# EAGLE board openSX70-dongle-USB-V2 - Copy (EAGLE 9.2.0)
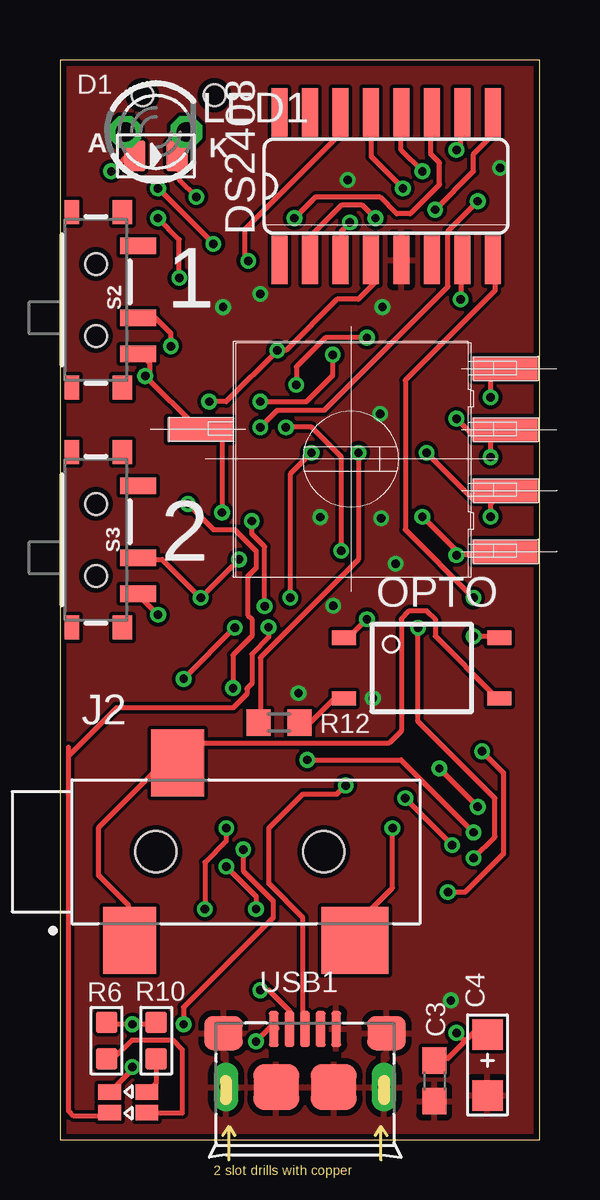
[diagram p0: board, top side]
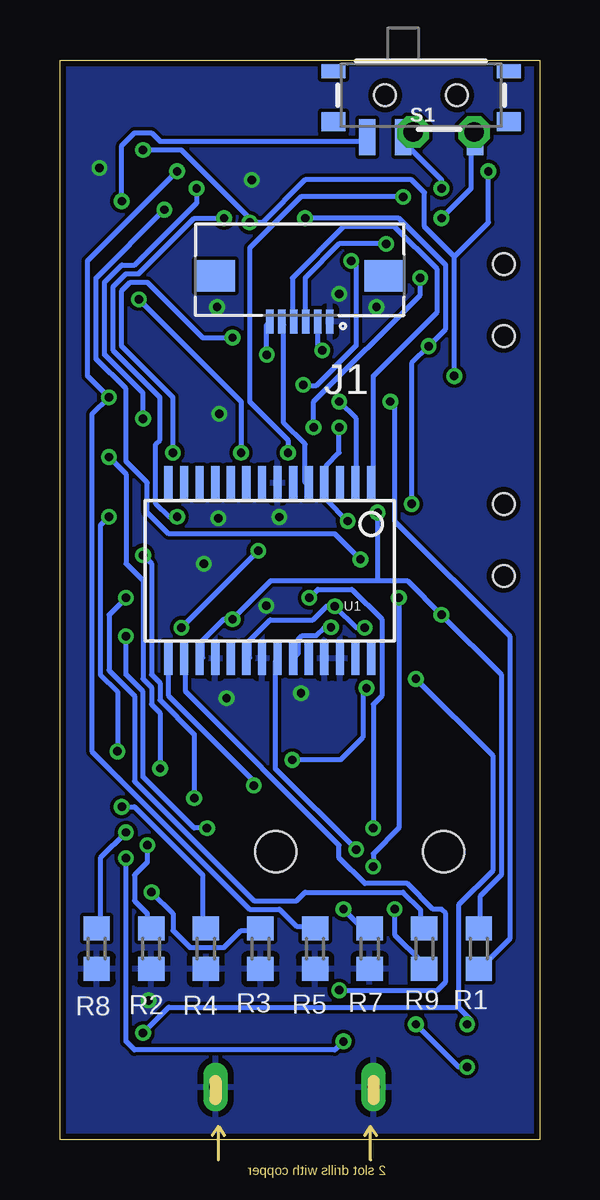
[diagram p1: board, bottom side, seen from below]

Size 20 x 45 mm. Coordinates in mm from the lower left corner, seen from the top.
Outline: 0,0 20,0 20,45 0,45 0,0
Copper layers (1*16): Top 0.035mm / dielectric 1.5mm / Bottom 0.035mm
Design rules "SeeedStudio_2layer_DRU_no_angle_20140221": minimum track width 6mil, minimum drill 12mil, track to track 6mil, track to pad 6mil, pad to pad 6mil, via to via 6mil, smd to smd 0mil, copper to edge 10mil, drill to drill 10mil, minimum pad ring 10mil, minimum via ring 6mil, stop-mask expansion 2mil, vias tented up to drill 100mil, thermal gap 10mil
Net classes: 0 GND: width 0.203 mm; 1 power: width 0.203 mm; 2 2.8V: width 0.203 mm

## Footprints (pad centres in the part's own frame; a part is rotated, then mirrored left to right if it is on the bottom)
C0603 = smd 1.1 x 1: 1 -0.85,0; 2 0.85,0
AVX-A = smd 1.27 x 1.27: + -1.27,0; - 1.27,0
LED-0805 = smd 0.889 x 1.27: + -0.889,0; - 0.889,0
SO16 = smd 0.66 x 2.032: 1 -4.445,-3.073; 2 -3.175,-3.073; 3 -1.905,-3.073; 4 -0.635,-3.073; 5 0.635,-3.073; 6 1.905,-3.073; 7 3.175,-3.073; 8 4.445,-3.073; 9 4.445,3.073; 10 3.175,3.073; 11 1.905,3.073; 12 0.635,3.073; 13 -0.635,3.073; 14 -1.905,3.073; 15 -3.175,3.073; 16 -4.445,3.073
687106183722 = smd 0.3 x 1: 1 -1.25,1.9; 2 -0.75,1.9; 3 -0.25,1.9; 4 0.25,1.9; 5 0.75,1.9; 6 1.25,1.9 | smd 1.65 x 1.3: Z1 -3.525,0; Z2 3.525,0
CUI_SJ-3523-SMT-TR = smd 2.2 x 2.8: 1 -1.1,-3.7; 3 0.9,3.7 | smd 2.8 x 2.8: 2 8.3,-3.7 | hole 1.7: 0,0; 7,0
LED3MM = drill 0.813 octagon: A -1.27,0; K 1.27,0
SO-4 = smd 1 x 0.6: 1 -3.24,0.635; 2 -3.24,-1.905; 3 3.24,-1.905; 4 3.24,0.635
R0603 = smd 1 x 1.1: 1 -0.85,0; 2 0.85,0
R0603' = smd 0.889 x 0.889: 1 0,0.762; 2 0,-0.762
SWITCH_SPST_SMD_A = smd 0.7 x 1.5: 1 -2.25,-1.75; 2 -0.75,-1.75; 3 2.25,-1.75 | smd 1 x 0.6: GND1 -3.65,1; GND3 3.65,1 | smd 1 x 0.8: GND2 -3.65,-1.1; GND4 3.65,-1.1 | hole 0.9: -1.5,0; 1.5,0
A6RS-161RS = smd 1 x 2.7: 1 8.89,-1.397; 2 6.35,-1.397; 4 3.81,-1.397; 8 1.27,-1.397; C 6.35,11.303
SSOP28DB = smd 0.348 x 1.397: 1 -4.225,-3.656; 2 -3.575,-3.656; 3 -2.925,-3.656; 4 -2.275,-3.656; 5 -1.625,-3.656; 6 -0.975,-3.656; 7 -0.325,-3.656; 8 0.325,-3.656; 9 0.975,-3.656; 10 1.625,-3.656; 11 2.275,-3.656; 12 2.925,-3.656; 13 3.575,-3.656; 14 4.225,-3.656; 15 4.225,3.656; 16 3.575,3.656; 17 2.925,3.656; 18 2.275,3.656; 19 1.625,3.656; 20 0.975,3.656; 21 0.325,3.656; 22 -0.325,3.656; 23 -0.975,3.656; 24 -1.625,3.656; 25 -2.275,3.656; 26 -2.925,3.656; 27 -3.575,3.656; 28 -4.225,3.656
LTST-BILED-15X16 = smd 0.65 x 0.952: P$1 0.425,0.776; P$2 -0.425,0.776; P$3 0.425,-0.776; P$4 -0.425,-0.776
MICRO-USB5+6P-SMD-0.65-B = smd 0.4 x 1.5: 1 -1.3,-0.25; 2 -0.65,-0.25; 3 0,-0.25; 4 0.65,-0.25; 5 1.3,-0.25 | smd 1.6 x 1.4: S1 -3.4,-0.427; S6 3.4,-0.427 | drill 0.508 pad 1.016 long: S2 -3.3,-2.675; S5 3.3,-2.675 | smd 1.9 x 1.9: S3 -1.2,-2.675; S4 1.2,-2.675

## Placement (x,y rotation side)
C3  100nf  [C0603]  15.61,2.45 270 top
C4  10uf  [AVX-A]  17.83,3.11 270 top
D1  YELLOW-0805  [LED-0805]  4,41 0 top
DS2408  DS2408  [SO16]  13.6,39.74 0 top
J1  687106183722  [687106183722]  10,36 180 bottom
J2  SJ-3523-SMT-TR  [CUI_SJ-3523-SMT-TR]  4,12 0 top
LED1  [LED3MM]  4,42 0 top
OPTO  TLP127  [SO-4]  15.09,20.29 0 top
R1  4K7  [R0603]  2.53,7.96 90 bottom
R2  100K  [R0603]  16.19,7.96 270 bottom
R3  100K  [R0603]  11.64,7.96 90 bottom
R4  100K  [R0603]  13.92,7.96 90 bottom
R5  100K  [R0603]  9.36,7.96 90 bottom
R6  1K  [R0603']  1.94,4.12 180 top
R7  100K  [R0603]  7.08,7.96 270 bottom
R8  100K  [R0603]  18.47,7.96 270 bottom
R9  220R  [R0603]  4.81,7.96 270 bottom
R10  1K  [R0603']  4.02,4.12 180 top
R12  220R  [R0603]  9.14,17.38 0 top
S1  [SWITCH_SPST_SMD_A]  4.94,43.53 0 bottom
S2  [SWITCH_SPST_SMD_A]  1.5,35 90 top
S3  [SWITCH_SPST_SMD_A]  1.5,25 90 top
SELECTOR  A6RS  [A6RS-161RS]  17.15,23.24 90 top
U1  FT232RLSSOP  [SSOP28DB]  11.25,23.71 180 bottom
U$5  DUOLED-PROPER-LTST-C195KGJRKT  [LTST-BILED-15X16]  2.85,1.55 270 top
USB1  10118193-0001LF  [MICRO-USB5+6P-SMD-0.65-B]  10.22,4.86 0 top

## Library data of the parts
C3 R1-R5 R7-R9 R12 = resistor
C4 = Seeed-Capacitor-2016; MPN: TAJA106K016RNJ
D1 = Seeed-LED-2016; MPN: 17-215UYC/S530-A3/TR8
DS2408 = DS2408-joaco
J1 = openSX70_PATHFINDER_V5.5-SEEED_20180522; AVAILABILITY: Good; DESCRIPTION: CONN FFC BTM 6POS 0.5MM SMD R/A; MF: Wurth Electronics; MP: 687106183722; PACKAGE: None; PRICE: 1.21 USD
J2 = SJ-3523-SMT-TR; AVAILABILITY: Unavailable; CUI_PURCHASE_URL: https://www.cui.com/product/interconnect/audio-connectors/3.5-mm-jacks/sj-352x-smt-series?utm_source=snapeda.com&utm_medium=referral&utm_campaign=snapedaBOM; DESCRIPTION: SJ Series 3.5 mm 12 V SMT Right Angle Stereo Audio Jack; MF: CUI Inc.; MP: SJ-3523-SMT-TR; PACKAGE: LGA-10 STMicroelectronics; PRICE: None
LED1 = openSX70_PATHFINDER_V5.5-SEEED_20180522
OPTO = openSX70
R6 R10 = openSX70_PATHFINDER_V5.5-SEEED_20180522; MPN: RC0603FR-071KL
S1-S3 = SparkFun-Switches; PROD_ID: SWCH-10651; SF_SKU: COM-10860
SELECTOR = _openSX70
U1 = SparkFun
U$5 = _openSX70; AVAILABILITY: Unavailable; DESCRIPTION: Green/Red 130° Water Clear 35/25 mcd 2 V 0605 Surface Mount Bi-Color LED; MF: Lite-On Inc.; MP: LTST-C195KGJRKT; PACKAGE: 0606 Lite-On; PRICE: None
USB1 = Seeed-Connector -2016; MPN: 10118193-0001LF

## Nets
1W: DS2408.4 J1.2 R1.1
3V3OUT: D1.+ DS2408.3 DS2408.10 LED1.A OPTO.1 R1.2 S2.1 S3.1 SELECTOR.C U1.17
5V: C3.1 C4.+ R6.2 R10.2 S1.1 U1.4 U1.20
5V-J1: J1.3 S1.2
CTS: U1.11
DTR: J1.6 U1.2
GND: C3.2 C4.- DS2408.5 J1.1 R2.2 R3.1 R4.1 R5.1 R7.2 R8.2 U1.7 U1.18 U1.21 U1.25 U1.26 USB1.5 USB1.S1 USB1.S2 USB1.S3 USB1.S4 USB1.S5 USB1.S6
N$1: J2.1 J2.3 OPTO.3
N$2: D1.- LED1.K R9.2
N$3: DS2408.2 R2.1 SELECTOR.8
N$4: DS2408.14 R3.2 SELECTOR.4
N$5: DS2408.13 R4.2 SELECTOR.2
N$6: DS2408.11 R8.1 S2.2
N$7: DS2408.9 R7.1 S3.2
N$8: DS2408.8 R9.1
N$9: R10.1 U$5.P$2
N$10: OPTO.2 R12.2
N$11: DS2408.7 R12.1
N$12: J2.2 OPTO.4
N$13: DS2408.12 R5.2 SELECTOR.1
N$14: R6.1 U$5.P$1
N$16: U1.16 USB1.2
RXI: J1.5 U1.5
RXLED: U1.22 U$5.P$4
TXLED: U1.23 U$5.P$3
TXO: J1.4 U1.1
USB_D+: U1.15 USB1.3
VCC-USB: S1.3 USB1.1

## Tracks (layer width: path | path; a pad name or v marks a point on that pad's centre or on a via)
1W  (via drill 0.35)
  Top 0.203: DS2408.4 12.98,36.63 13.16,36.45 13.16,35.74 12.45,35.03 11.56,35.03 9.42,32.89 v9.07,32.89 6.93,30.76 v6.22,30.76
  Bottom 0.203: v9.07,32.89 9.25,33.07 9.25,33.96 J1.2 | v6.22,30.76 6.04,30.58 6.04,25.78 1.25,20.98 1.25,8.36 2.49,7.11 R1.1
3V3OUT  (via drill 0.35)
  Top 0.203: v12.8,21.69 12.09,20.98 11.91,20.98 OPTO.1 | v4.09,21.87 3.38,22.58 S3.1 | 3.02,40.89 2.67,40.89 v2.13,40.36 | 3.02,40.89 D1.+ | S2.1 3.38,32.72 3.73,32.36 3.73,32 v3.56,31.83 5.69,29.69 SELECTOR.C 5.87,29.52 6.4,29.52 6.76,29.16 v6.76,26.14 | v12.09,38.23 11.73,37.87 11.73,36.8 DS2408.3 | v16.54,41.25 16.71,41.43 16.71,42.67 DS2408.10 | LED1.A 2.73,41.19 3.02,40.89
  Bottom 0.203: U1.17 14.05,20.09 14.05,20.8 13.16,21.69 v12.8,21.69 11.2,23.29 6.76,23.29 | 6.76,23.29 5.51,23.29 v4.09,21.87 1.6,19.38 1.6,11.02 2.49,10.13 2.49,8.89 R1.2 | v2.13,40.36 2.13,38.23 3.56,36.8 | v3.56,31.83 3.56,36.8 | 11.91,38.23 11.56,38.23 9.78,40.01 5.33,40.01 4.8,39.47 4.8,38.05 3.56,36.8 | v16.54,41.25 14.94,41.25 11.91,38.23 | 11.91,38.23 v12.09,38.23 | v6.76,26.14 6.76,23.29
5V  (via drill 0.35)
  Top 0.203: R6.2 1.96,4.8 v3.02,4.8 3.91,4.8 R10.2 | 16.89,4.09 17.25,4.45 17.78,4.45 C4.+ | 16.89,4.09 16.18,3.38 15.65,3.38 C3.1 | 16.89,4.09 v16.54,4.45 | v8,25.78 8,25.25 8.53,24.71 v8.53,22.23 | v17.42,39.12 16.18,37.87 16.18,35.56 11.02,30.4 9.07,30.4 v8.36,29.69 | v7.29,21.34 v5.16,19.2
  Bottom 0.203: v3.02,4.8 2.85,4.8 2.85,4.98 3.38,5.51 | 3.38,5.51 15.47,5.51 v16.54,4.45 | v8,25.78 8.89,26.67 8.89,27.2 U1.4 8.89,27.38 8.89,28.09 8.36,28.63 v8.36,29.69 | U1.20 12.09,20.09 12.09,20.8 11.23,21.66 9.46,21.66 8.89,22.23 v8.53,22.23 7.64,21.34 v7.29,21.34 | v17.42,39.12 17.42,41.43 16.89,41.96 16.18,41.96 15.82,41.6 7.29,41.6 S1.1 | 3.38,5.51 3.38,9.78 1.96,11.2 1.96,16 v5.16,19.2
5V-J1  (via drill 0.35)
  Top 0.203: v4.09,39.65 v6.4,37.34
  Bottom 0.203: v6.4,37.34 8.36,37.34 9.78,35.92 9.78,34.14 J1.3 | v4.09,39.65 4.09,40.01 5.69,41.6 S1.2
DTR  (via drill 0.35)
  Top 0.203: v11.38,32.72 11.38,31.86 10.27,30.76 v8.36,30.76
  Bottom 0.203: v11.38,32.72 11.38,33.96 J1.6 | v8.36,30.76 7.64,30.05 7.64,27.38 U1.2
GND  (via drill 0.35)
  other vias: 14,24 12,40 11.4,22.25 13.35,30.25 6.8,34.7 8.35,35.25 9.95,18.6 13.45,34.7 13.05,18.4 10.85,25.95 13.4,25.9 18.35,40.5 16.3,5.8
  pour Top: 0,45 20,45 20,0 0,0
  pour Bottom: 0,45 20,45 20,0 0,0
N$1
  Top 0.203: OPTO.3 18.31,18.49 18.14,18.49 15.65,20.98 15.65,21.69 15.29,22.05 14.58,22.05 14.23,21.7 14.23,17.03 13.73,16.54 5.69,16.54 4.98,15.82 J2.3 4.8,15.65 4.27,15.65 1.6,12.98 1.6,11.02 2.85,9.78 2.85,8.36 J2.1
N$2  (via drill 0.35)
  Top 0.203: v6.04,9.6 6.04,11.56 6.93,12.45 v6.93,12.98 | v9.6,22.58 9.6,27.74 v10.49,28.63 | v5.69,39.29 4.98,40.01 4.98,40.89 D1.- 5.27,41.38 LED1.K
  Bottom 0.203: v6.04,9.6 6.04,8.53 4.98,7.47 4.98,7.11 R9.2 | v6.93,12.98 6.93,18.14 6.58,18.49 6.58,21.69 7.82,22.94 9.25,22.94 v9.6,22.58 | v10.49,28.63 10.49,29.16 12.09,30.76 12.09,37.16 9.96,39.29 v5.69,39.29
N$3  (via drill 0.35)
  Top 0.203: v14.4,14.22 v16.36,12.27 | 16.71,24.36 18.49,24.36 SELECTOR.8 | v13.16,38.41 12.62,38.94 11.73,38.94 10.49,37.69 10.49,36.8 DS2408.2 | 16.71,24.36 v15.11,25.96 | 16.71,24.36 v16.54,24.36
  Bottom 0.203: v16.36,12.27 16.36,11.56 16.89,11.02 16.89,9.96 16.36,9.42 16.36,8.89 R2.1 | v14.4,14.22 14.4,16.89 15.82,18.31 15.82,19.02 16.18,19.38 16.18,24 v16.54,24.36 | v13.16,38.41 14.4,38.41 16.71,36.09 17.25,36.09 17.78,35.56 17.78,32.89 15.82,30.94 15.82,29.16 16,28.98 16,26.49 15.47,25.96 v15.11,25.96
N$4  (via drill 0.35)
  Top 0.203: v16.18,10.31 16.89,10.31 18.49,11.91 18.49,15.29 v17.6,16.18 | v17.96,25.96 17.96,26.49 18.14,26.67 | 18.14,26.67 18.49,27.03 SELECTOR.4 18.14,26.67 | v7.85,36.63 7.7,36.78 7.7,37.93 11.56,41.78 11.56,42.67 DS2408.14 | v9.86,31.46 9.86,32.21 11.07,33.43 v12.8,33.43 | v15.29,28.63 17.25,26.67 18.14,26.67
  Bottom 0.203: v16.18,10.31 15.29,9.42 15.29,8.71 14.58,8 13.16,8 12.45,8.71 11.73,8.71 R3.2 | v17.6,16.18 17.6,18.67 18.31,19.38 18.31,25.6 v17.96,25.96 | v7.85,36.63 7.65,36.43 7.65,33.09 9.31,31.43 9.83,31.43 v9.86,31.46 | v12.8,33.43 14.05,33.43 16.36,35.74 17.07,35.74 17.42,35.38 17.42,33.07 15.29,30.94 v15.29,28.63
N$5  (via drill 0.35)
  Top 0.203: v15.82,15.47 v17.42,13.87 | v17.96,28.45 17.96,29.16 18.14,29.34 | 18.14,29.34 18.49,29.69 SELECTOR.2 18.14,29.34 | v14.3,39.65 12.98,40.97 12.98,42.67 DS2408.13 | v16.54,30.05 17.25,29.34 18.14,29.34
  Bottom 0.203: v17.42,13.87 16.89,13.87 14.05,11.02 14.05,8.89 R4.2 | v15.82,15.47 15.82,17.78 16.18,18.14 16.18,18.85 16.54,19.2 16.54,23.29 17.25,24 17.25,27.74 v17.96,28.45 | v14.3,39.65 14.3,39.04 16.89,36.45 17.42,36.45 18.14,35.74 18.14,32.72 16.54,31.11 v16.54,30.05
N$6  (via drill 0.35)
  Top 0.203: v17.25,12.8 14.22,15.82 v10.31,15.82 | v7.22,18.82 7.22,20.2 8,20.98 8,21.69 7.82,21.87 7.82,23.47 8.18,23.82 8.18,24.54 7.29,25.43 6.4,25.43 v5.33,26.49 | v4.62,33.07 4.62,33.6 3.91,34.31 3.38,34.31 S2.2 | v9.78,38.41 10.67,39.29 13.34,39.29 14.04,38.59 14.61,38.59 15.82,39.8 15.82,40.72 15.47,41.07 15.47,42.67 DS2408.11
  Bottom 0.203: v17.25,12.8 18.31,11.73 18.31,8.89 R8.1 | v7.22,18.82 7.37,18.67 7.37,16.77 8.31,15.82 v10.31,15.82 | v5.33,26.49 5.33,32.36 v4.62,33.07 3.91,33.78 3.91,36.45 5.87,38.41 v9.78,38.41
N$7  (via drill 0.35)
  Top 0.203: v8.18,9.6 8.18,10.13 v6.93,11.38 | S3.2 3.38,24.18 4.27,24.18 v5.87,22.58 v7.47,24.18 | v15.65,38.76 17.25,40.36 17.25,41.07 17.96,41.78 17.96,42.67 DS2408.9
  Bottom 0.203: v8.18,9.6 7.47,8.89 7.11,8.89 R7.1 | v6.93,11.38 6.93,11.91 5.87,12.98 v5.87,22.58 | v15.65,38.76 18.49,35.92 18.49,32.54 17.25,31.29 17.25,28.27 16.36,27.38 16.36,26.14 15.47,25.25 8.53,25.25 v7.47,24.18
N$8  (via drill 0.35)
  Top 0.203: v17.25,22.58 14.4,25.43 14.4,31.65 18.14,35.38 18.14,36.63 DS2408.8
  Bottom 0.203: v17.25,22.58 17.96,21.87 17.96,19.56 16.89,18.49 16.89,14.94 11.91,9.96 10.13,9.96 9.78,10.31 5.69,10.31 4.98,9.6 4.98,8.89 R9.1
N$9
  Top 0.203: R10.1 4.02,2.37 U$5.P$2
N$10
  Top 0.203: OPTO.2 11.73,18.31 11.38,18.31 10.49,17.42 10.03,17.42 R12.2
N$11  (via drill 0.35)
  Top 0.203: v12.45,28.63 12.45,24.18 8.36,20.09 8.36,17.48 R12.1 | v16.71,35.03 16.71,36.63 DS2408.7
  Bottom 0.203: v12.45,28.63 12.45,30.76 v16.71,35.03
N$12  (via drill 0.35)
  Top 0.203: v17.25,20.98 18.31,20.98 OPTO.4 | v13.87,12.98 13.87,10.49 12.45,9.07 12.45,8.36 J2.2
  Bottom 0.203: v17.25,20.98 17.25,19.38 16.54,18.67 16.54,15.11 14.4,12.98 v13.87,12.98
N$13  (via drill 0.35)
  Top 0.203: v17.96,30.94 17.96,31.65 18.49,32.18 SELECTOR.1 | v15.11,40.36 14.22,41.25 14.22,42.67 DS2408.12
  Bottom 0.203: R5.2 9.42,8.89 10.13,8.89 10.85,9.6 12.09,9.6 18.67,16.18 18.67,30.23 v17.96,30.94 18.85,31.83 18.85,36.63 v15.11,40.36
N$14
  Top 0.203: R6.1 2.21,3.36 3,4.15 4.7,4.15 5.1,3.75 5.1,1.1 3.65,1.1 U$5.P$1
N$16  (via drill 0.35)
  Top 0.203: v8.36,6.22 8.71,6.22 9.6,5.33 9.6,4.62 USB1.2
  Bottom 0.203: v8.36,6.22 4.27,6.22 3.91,6.58 3.91,9.42 4.09,9.6 4.45,9.6 5.51,10.67 7.29,10.67 8.36,11.73 8.36,12.27 14.76,18.67 14.76,19.91 U1.16
RXI
  Bottom 0.203: J1.5 10.67,33.96 10.67,29.87 9.78,28.98 9.78,27.38 U1.5
RXLED  (via drill 0.35)
  Top 0.203: v5.16,4.8 5.16,5.51 8.89,9.25 8.89,9.96 7.64,11.2 v7.64,12.09 | v3.02,3.02 3.02,2.92 U$5.P$4
  Bottom 0.203: v3.02,3.02 3.38,3.02 v5.16,4.8 | v7.64,12.09 11.02,15.47 11.02,19.91 U1.22
TXLED  (via drill 0.35)
  Top 0.203: 0.36,16 0.36,1.19 0.57,0.97 1.92,0.97 U$5.P$3 | 0.36,16 0.36,16.36 | v8.7,21.35 8.7,20.94 8,20.24 8,19 7.8,18.8 7.8,18.58 7.22,18 2.36,18 0.36,16
  Bottom 0.203: U1.23 10.05,20.28 10.05,20.86 9.9,21.01 9.32,21.01 8.98,21.35 v8.7,21.35
TXO
  Bottom 0.203: J1.4 10.31,34.14 10.31,35.92 8.18,38.05 6.04,38.05 4.27,36.27 4.27,34.49 6.93,31.83 6.93,27.38 U1.1
USB_D+  (via drill 0.35)
  Top 0.203: v11.91,14.76 11.56,14.4 10.13,14.4 8.71,12.98 8.71,10.67 10.13,9.25 10.13,4.62 USB1.3
  Bottom 0.203: v11.91,14.76 11.91,14.94 15.47,18.49 15.47,19.91 U1.15
VCC-USB  (via drill 0.35)
  Top 0.203: v4.09,38.41 4.98,37.52 v4.98,35.92 | v9.42,29.69 10.49,29.69 11.73,28.45 v11.73,24.54 | v14.94,21.34 14.94,17.42 18.14,14.22 18.14,12.62 v17.25,11.73 | v8.18,4.09 8.89,4.8 9.07,4.62 USB1.1
  Bottom 0.203: v4.09,38.41 2.85,39.65 2.85,41.6 S1.3 | v4.98,35.92 4.98,35.2 9.42,30.76 v9.42,29.69 | v14.94,21.34 v11.73,24.54 | v17.25,11.73 17.25,4.09 16.89,3.73 8.53,3.73 v8.18,4.09

## Text on the board
tPlace: 1 | 2
tNames: A | K